# Altium PCB G431.PcbDoc
Units mil, origin at the board's own origin, x right, y up, seen from the top; angles counter-clockwise.
Board outline 2050 x 1660 mil, 2 copper layers (Top Layer, Bottom Layer); 32 components, 52 nets, 167 pads, 73 vias.
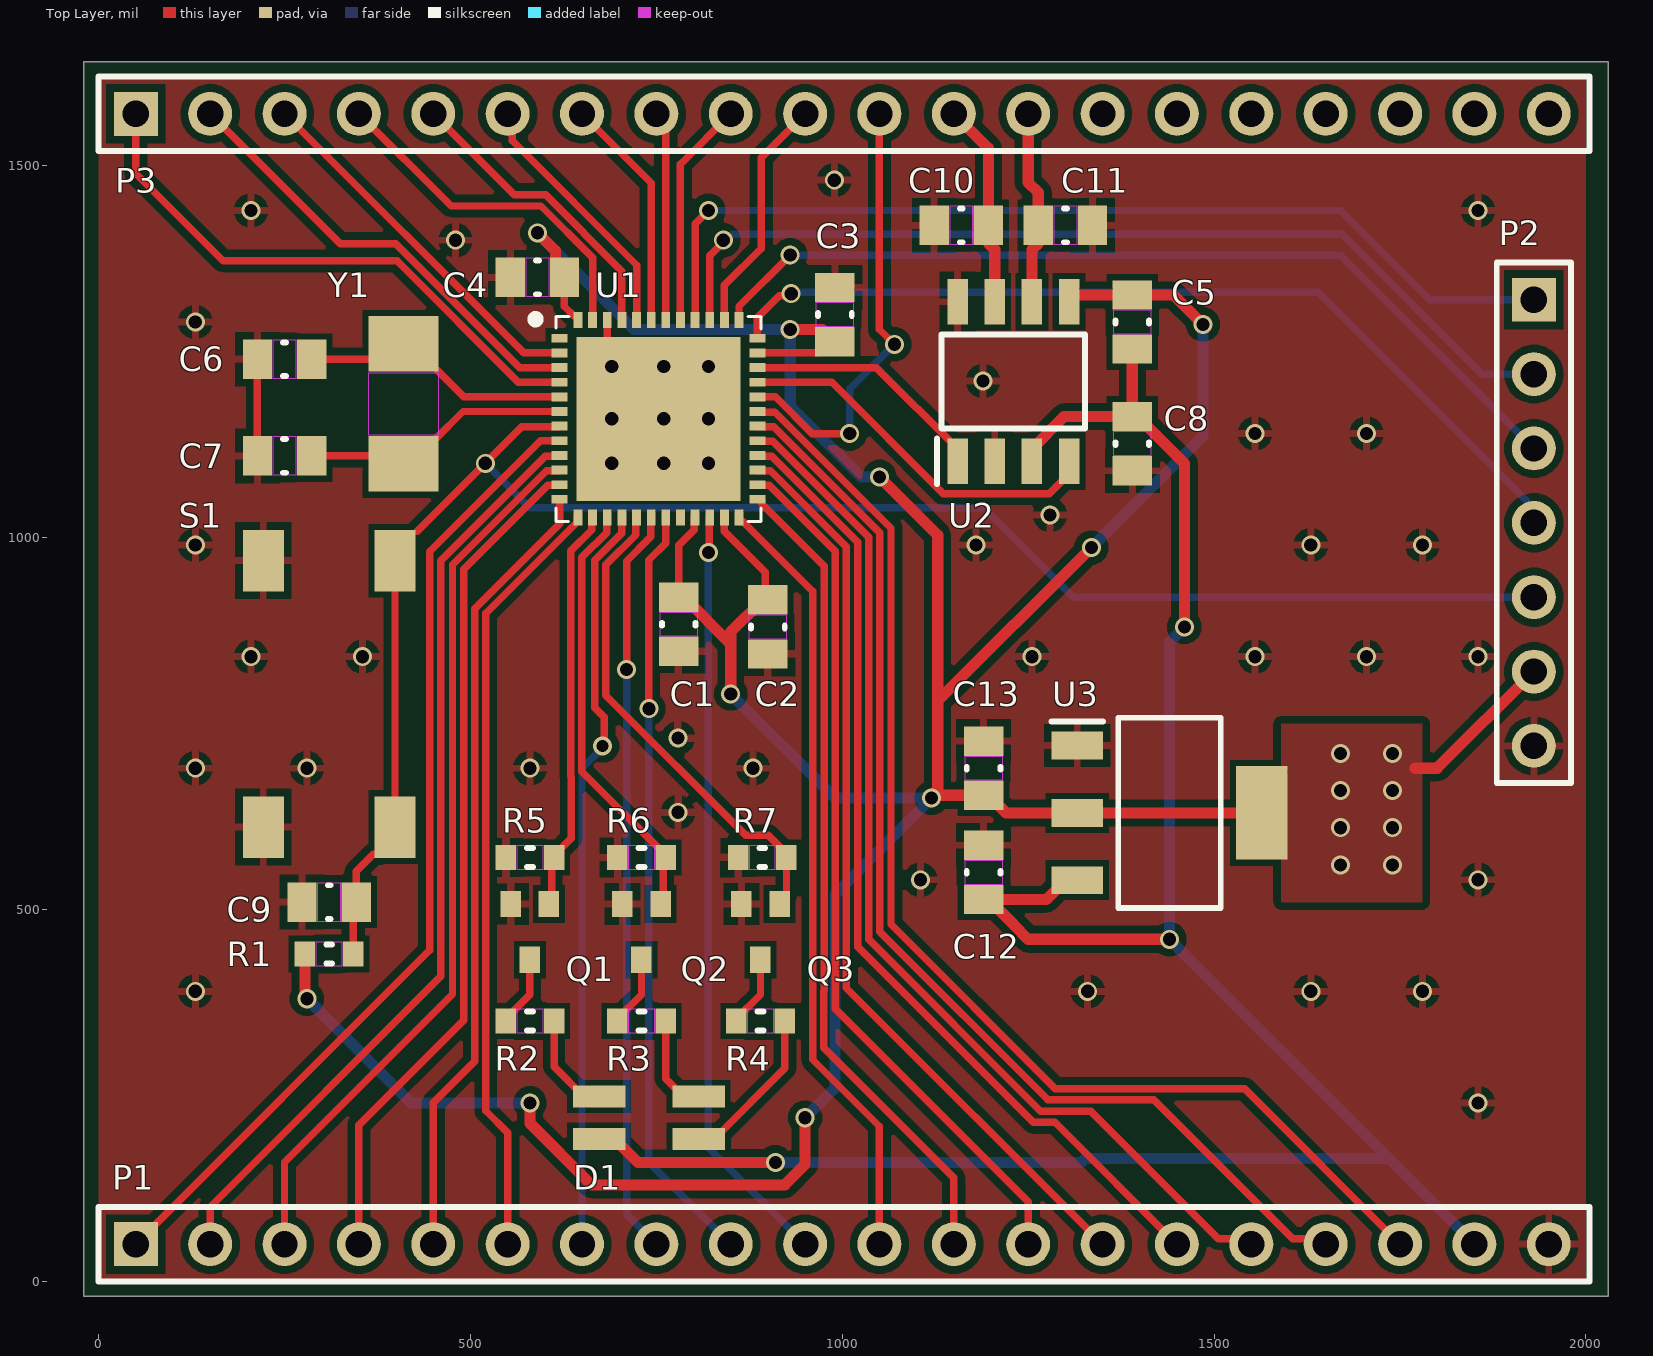
[diagram p0: Top Layer view]
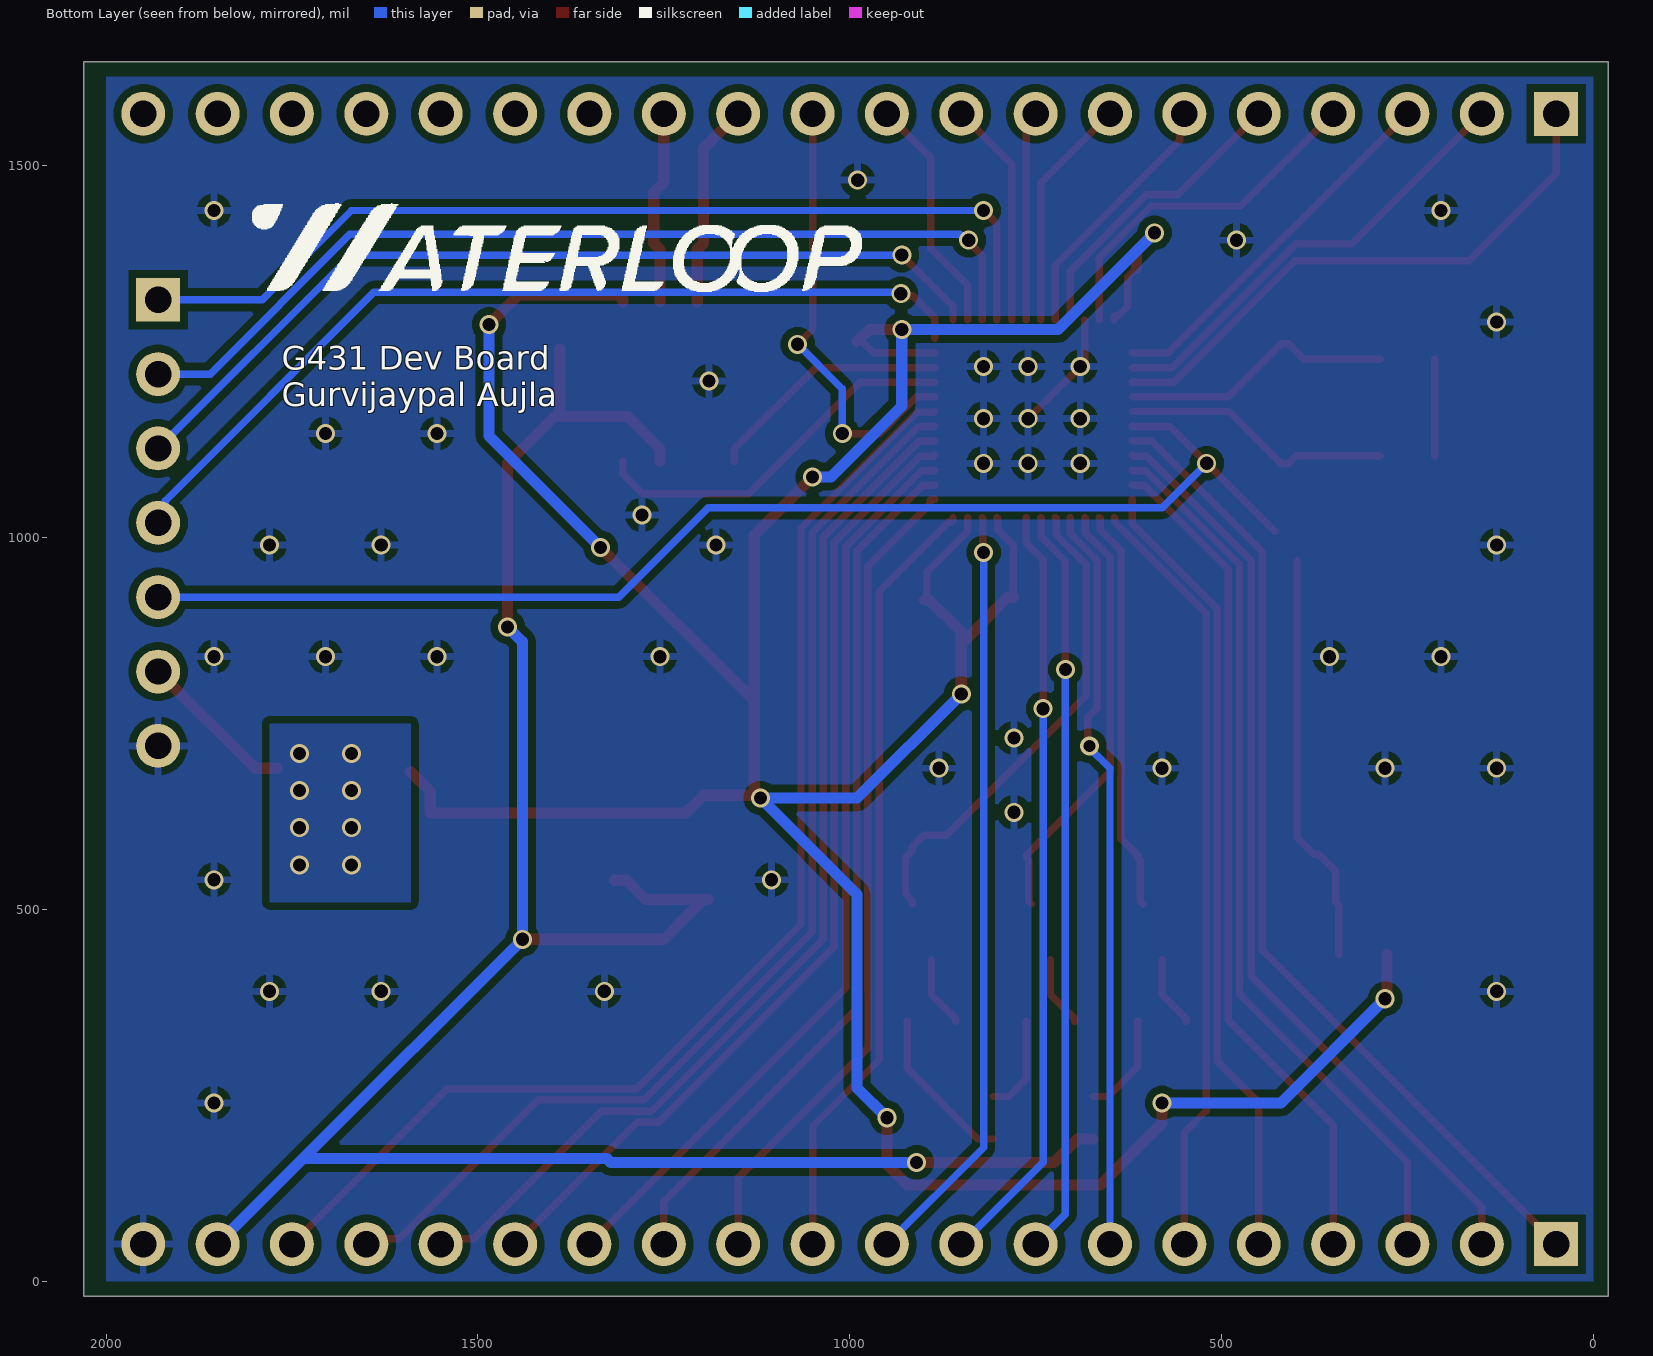
[diagram p1: Bottom Layer view, seen from below]
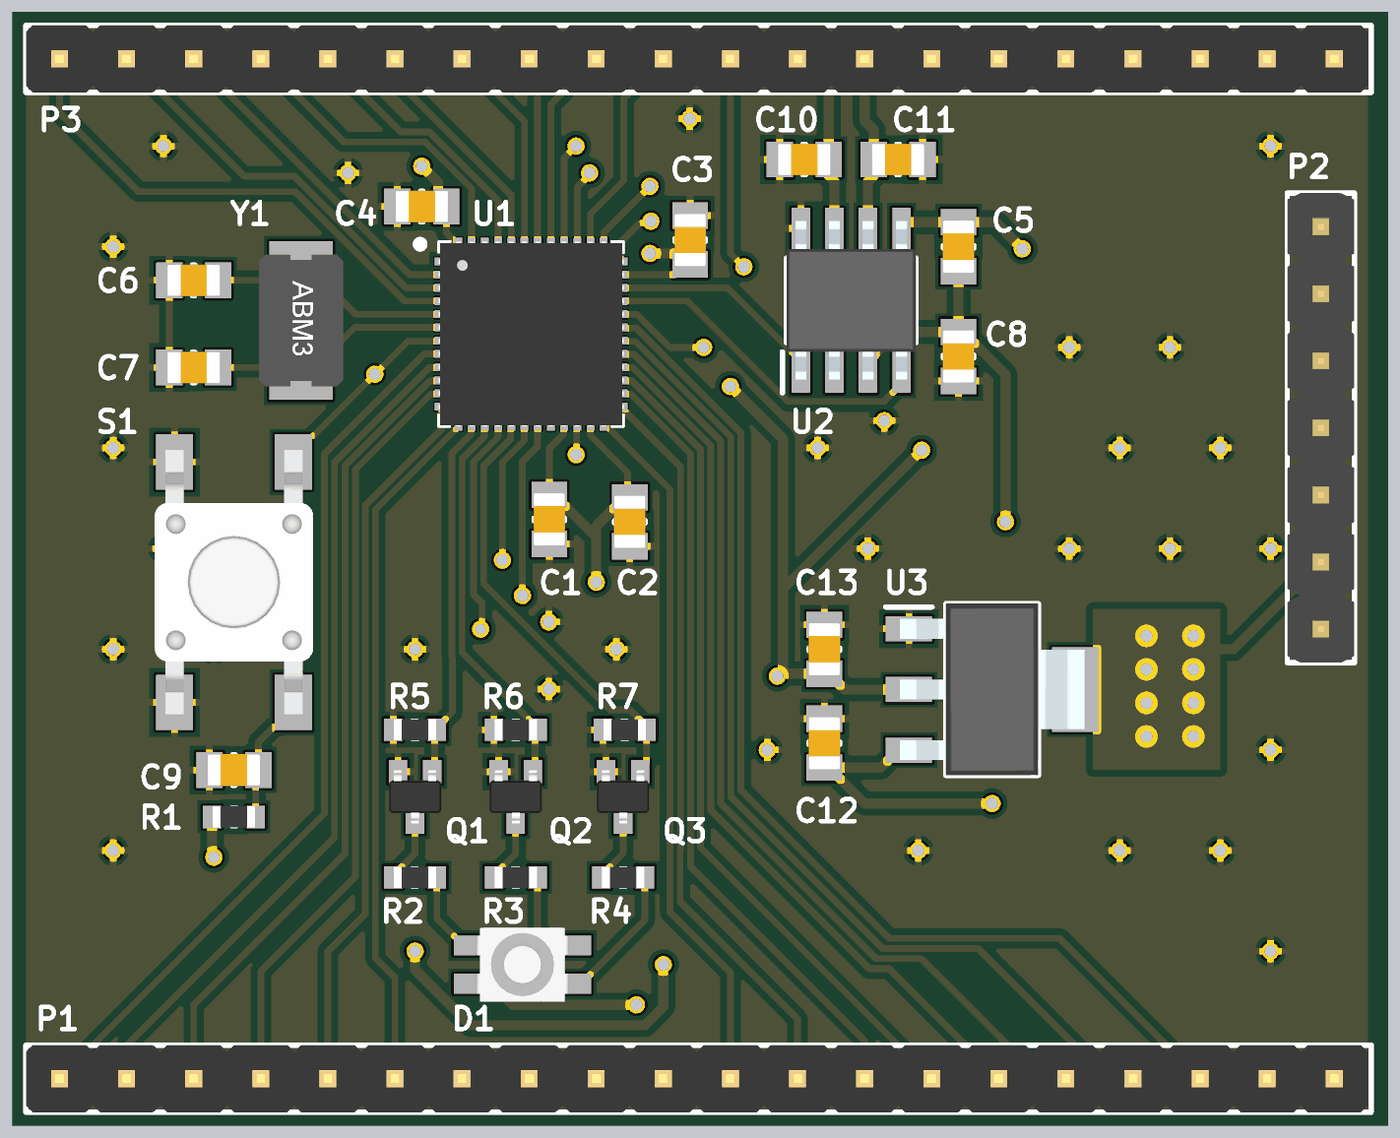
[diagram p2: 3D render of the assembled board from above, using the file's embedded part models]

## Layer stack, top to bottom
Top Solder: solder mask 0.4, Solder Resist, Dk 3.5
Top Layer: signal copper 1.4
Dielectric 1: dielectric 12.6, FR-4, Dk 4.8
Bottom Layer: signal copper 1.4
Bottom Solder: solder mask 0.4, Solder Resist, Dk 3.5

## Board outline
-20,1640 -20,-20 2030,-20 2030,1640

## Design rules (kind name [scope] priority, off if disabled: settings)
Clearance [All] p1: gap=10 ignorepadtopadclearanceinfootprint=FALSE except(0: Arc-Hole Track-Hole SMDPad-Hole THPad-Hole Via-Hole Fill-Hole Poly-Hole Region-Hole Text-Hole; 5: Arc-Arc Arc-Track Track-Track SMDPad-SMDPad; 7.87: Arc-SMDPad Track-SMDPad SMDPad-Fill SMDPad-Poly SMDPad-Region)
DiffPairsRouting [All] p1: maxlimit=10 minlimit=10 mostfreqgap=10 toplayer_minwidth=15 toplayer_maxwidth=15 toplayer_prefwidth=15 bottomlayer_minwidth=15 bottomlayer_maxwidth=15 bottomlayer_prefwidth=15 maxuncoupledlength=500
PolygonConnect PolygonConnect_2 [All vs IsNamedPolygon('3V3_L02_P002')] p1: connectstyle=Direct reliefconductorwidth=10 reliefentries=4 polygonreliefangle="90 Angle" airgapwidth=10
PolygonConnect PolygonConnect_1 [All vs IsNamedPolygon('3V3_L01_P001')] p2: connectstyle=Direct reliefconductorwidth=10 reliefentries=4 polygonreliefangle="90 Angle" airgapwidth=10
PolygonConnect [All] p3: connectstyle=Relief reliefconductorwidth=10 reliefentries=4 polygonreliefangle="90 Angle" airgapwidth=10
RoutingVias [All] p1: holewidth=19.68 width=39.37 viastyle="Through Hole" minholewidth=7.87 minwidth=23.62 maxholewidth=28 maxwidth=50
SilkToSolderMaskClearance [IsPad] p1: minsilkscreentomaskgap=5.91 clearancetoexposedcopper=TRUE
SolderMaskExpansion [All] p1: expansion=4 istentingtop=FALSE
Width [All] p1: maxlimit=15 minlimit=10 preferedwidth=15 toplayer_prefwidth=10 minimp=50.000000 maximp=50.000000 favimp=50.000000
28 further rules are at their usual default settings.

## Classes and differential pairs
net class PC[0..15]: PC0 PC1 PC2 PC3 PC4 PC5 PC6 PC7 PC8 PC9 PC10 PC11 PC12 PC13 PC14 PC15
net class PB[0..15]: PB0 PB1 PB2 PB3 PB4 PB5 PB6 PB7 PB8 PB9 PB10 PB11 PB12 PB13 PB14 PB15
net class PA[0..15]: PA0 PA1 PA2 PA3 PA4 PA5 PA6 PA7 PA8 PA9 PA10 PA11 PA12 PA13 PA14 PA15
component class "STM MCU": C1 C2 C3 C4 C5 C6 C7 C8 C9 C10 C11 D1 Q1 Q2 Q3 R1 R2 R3 R4 R5 R6 R7 S1 U1 U2 Y1
component class Main: C12 C13 P1 P2 P3 U3
differential pair CAN: +CAN_P -CAN_N

## Components (designator, comment, footprint, x,y, rotation, side; value= is the part's Value field where it differs from the comment)
C1 "Capacitor - Nonpolarized" "0805 - Capacitor" 780,883.58 r270 top value=10nF
C2 "Capacitor - Nonpolarized" "0805 - Capacitor" 900,880 r270 top value=0.1uF
C3 "Capacitor - Nonpolarized" "0805 - Capacitor" 990,1300 r90 top value=0.1uF
C4 "Capacitor - Nonpolarized" "0805 - Capacitor" 590,1350 r180 top value=0.1uF
C5 "Capacitor - Nonpolarized" "0805 - Capacitor" 1390,1290 r90 top value=0.1uF
C6 "Capacitor - Nonpolarized" "0805 - Capacitor" 250,1240 r0 top value=28pF
C7 "Capacitor - Nonpolarized" "0805 - Capacitor" 250,1110 r0 top value=28pF
C8 "Capacitor - Nonpolarized" "0805 - Capacitor" 1390,1126.42 r270 top value=0.1uF
C9 "Capacitor - Nonpolarized" "0805 - Capacitor" 310,510 r180 top value=0.1uF
C10 "Capacitor - Nonpolarized" "0805 - Capacitor" 1160,1420 r0 top value=0.1nF
C11 "Capacitor - Nonpolarized" "0805 - Capacitor" 1300,1420 r180 top value=0.1nF
C12 "Capacitor - Nonpolarized" "0805 - Capacitor" 1190,550 r270 top value=10uF
C13 "Capacitor - Nonpolarized" "0805 - Capacitor" 1190,690 r270 top value=10uF
D1 "RGB LED- Common Anode" "4-PLCC RGB LED" 740,220 r0 top
P1 "1x20 Header" HDR1X20 50,50 r0 top
P2 "1x7 Header" HDR1X7 1930,1320 r270 top
P3 "1x20 Header" HDR1X20 50,1570 r0 top
Q1 "MOSFET-N" SC70/SOT323 580,470 r0 top
Q2 "MOSFET-N" SC70/SOT323 730,470 r0 top
Q3 "MOSFET-N" SC70/SOT323 890,470 r0 top
R1 "Resistor" "0603 - Resistor" 310,440 r180 top value=10K
R2 "Resistor" "0603 - Resistor" 580,350 r0 top value=1K
R3 "Resistor" "0603 - Resistor" 730,350 r0 top value=1K
R4 "Resistor" "0603 - Resistor" 890,350 r0 top value=1K
R5 "Resistor" "0603 - Resistor" 580,570 r0 top value=10K
R6 "Resistor" "0603 - Resistor" 730,570 r0 top value=10K
R7 "Resistor" "0603 - Resistor" 892.48,570 r0 top value=10K
S1 "Switch - Push Button" "6x6mm Switch" 310,790 r270 top
U1 "STM32G431CBU6" STM32G431CBU6 620,1268.11 r0 top
U2 "TJA1051T_3,118" TJA1051T/3,118 1230,1210 r90 top
U3 "TLV1117-33IDCYR" TLV1117 1440,630 r0 top
Y1 "Oscillator" "2-SMD NO LEAD CRSYSTAL" 410,1180 r270 top

## Footprints (in the part's own frame and the unit in brackets; to place one, negate y for a bottom-side part, rotate by r counter-clockwise, add the part's x,y. Pads: shape width x height; smd on the part's side, far side on the other; paste and mask are expansions set on the pad)
"2-SMD NO LEAD CRSYSTAL" [mm]
  rect 1.9x2.4 smd: 1(-2.05,0) 2(2.05,0)
  Top Layer keep-out region: -1.05,1.2 -1.05,-1.2 1.05,-1.2 1.05,1.2
  body extent -2.5,-1.6 2.5,1.6, height 1.3
"4-PLCC RGB LED" [mm]
  rect 1.8x0.75 smd: 1(1.7,-0.725) 2(1.7,0.725) 3(-1.7,0.725) 4(-1.7,-0.725)
  body extent -1.75,-1.4 1.75,1.4, height 1.9
"6x6mm Switch" [mm]
  rect 2.1x1.4 smd: 1(-4.55,2.25) 1(4.55,2.25) 2(-4.55,-2.25) 2(4.55,-2.25)
  body extent -5,-3 5,3, height 5.12
"0603 - Resistor" [mm] "0603 Chip Resistor - IPC Medium Density"
  rect 0.7x0.85 smd: 1(-0.825,0) 2(0.825,0)
  Top Layer keep-out region: -0.45,0.4 -0.45,-0.4 0.45,-0.4 0.45,0.4
  silkscreen extent -0.1,-0.33 0.1,0.33, body extent -0.8,-0.4 0.8,0.4, height 0.45
"0805 - Capacitor" [mm] "0805 Chip Capacitor - IPC Medium Density"
  rect 1x1.35 smd: 1(-0.925,0) 2(0.925,0)
  Top Layer keep-out region: -0.4,0.65 -0.4,-0.65 0.4,-0.65 0.4,0.65
  silkscreen extent -0.05,-0.58 0.05,0.58, body extent -1,-0.6 1,0.6, height 1.2
HDR1X7 [mm] "Connector; Header; 7 Position"
  rect 1.5x1.5 hole 0.9: 1(0,0)
  round 1.5 hole 0.9: 2(2.54,0) 3(5.08,0) 4(7.62,0) 5(10.16,0) 6(12.7,0) 7(15.24,0)
  silkscreen extent -1.27,-1.27 16.51,1.27, body extent -1.27,-1.27 16.51,1.27, height 8.54
HDR1X20 [mm] "Connector; Header; 20 Position"
  rect 1.5x1.5 hole 0.9: 1(0,0)
  round 1.5 hole 0.9: 2(2.54,0) 3(5.08,0) 4(7.62,0) 5(10.16,0) 6(12.7,0) 7(15.24,0) 8(17.78,0) 9(20.32,0) 10(22.86,0) 11(25.4,0) 12(27.94,0) 13(30.48,0) 14(33.02,0) 15(35.56,0) 16(38.1,0) 17(40.64,0) 18(43.18,0) 19(45.72,0) 20(48.26,0)
  silkscreen extent -1.27,-1.27 49.66,1.27, body extent -1.27,-1.27 49.53,1.27, height 8.54
SC70/SOT323 [mm]
  rect 0.7x0.9 smd: 1(0.65,0.95) 2(0,-0.95) 3(-0.65,0.95)
  body extent -1,-1 1,1, height 1.05
STM32G431CBU6 [mm] "48-UFQFPN (7x7)"
  rect 0.55x0.3 smd mask+0.06: 1(0,0) 2(0,-0.5) 3(0,-1) 4(0,-1.5) 5(0,-2) 6(0,-2.5) 7(0,-3) 8(0,-3.5) 9(0,-4) 10(0,-4.5) 11(0,-5) 12(0,-5.5) 25(6.75,-5.5) 26(6.75,-5) 27(6.75,-4.5) 28(6.75,-4) 29(6.75,-3.5) 30(6.75,-3) 31(6.75,-2.5) 32(6.75,-2) 33(6.75,-1.5) 34(6.75,-1) 35(6.75,-0.5) 36(6.75,0)
  rect 0.3x0.55 smd mask+0.06: 13(0.625,-6.125) 14(1.125,-6.125) 15(1.625,-6.125) 16(2.125,-6.125) 17(2.625,-6.125) 18(3.125,-6.125) 19(3.625,-6.125) 20(4.125,-6.125) 21(4.625,-6.125) 22(5.125,-6.125) 23(5.625,-6.125) 24(6.125,-6.125) 37(6.125,0.625) 38(5.625,0.625) 39(5.125,0.625) 40(4.625,0.625) 41(4.125,0.625) 42(3.625,0.625) 43(3.125,0.625) 44(2.625,0.625) 45(2.125,0.625) 46(1.625,0.625) 47(1.125,0.625) 48(0.625,0.625)
  rect 5.6x5.6 smd: 49(3.375,-2.75)
  silkscreen extent -0.95,-6.25 6.88,0.78, body extent -0.12,-6.25 6.88,0.75, height 1.1
TJA1051T/3,118 [mm] "SOIC127P600X175-8N"
  rect 1.55x0.7 smd: 1(-2.725,1.905) 2(-2.725,0.635) 3(-2.725,-0.635) 4(-2.725,-1.905) 5(2.725,-1.905) 6(2.725,-0.635) 7(2.725,0.635) 8(2.725,1.905)
  silkscreen extent -3.5,-2.45 1.6,2.61, body extent -3,-2.45 3,2.45, height 1.75
TLV1117 [mm] "SOT230P700X180-4N"
  rect 1.75x0.95 smd: 1(-3.15,2.3) 2(-3.15,0) 3(-3.15,-2.3)
  rect 1.75x3.2 smd: 2(3.15,0)
  silkscreen extent -4.03,-3.25 1.75,3.25, body extent -3.5,-3.25 3.5,3.25, height 1.8

## Part data
C1 C2 C3 C4 C5 C6 C7 C8 C9 C10 C11 C12 C13: "Nonpolarized Capacitor"
P1 P3: "1x20 Pin Header"
P2: "1x7 Pin Header"
Q1 Q2 Q3: "N-Channel MOSFET"
S1: "Push Button Switch"
U1: "128K FLASH + 32K RAM MICRO", Manufacturer=ST, Supplier Part Number=C529356, ComponentLink1Description=Datasheet, ComponentLink1URL=https://www.st.com/resource/en/datasheet/stm32g431cb.pdf, Manufacturer Part Number=STM32G431CBU6, Supplier=JLCPCB
U2: "CAN Transceiver IC 4.5V-5.5V 250ns", Manufacturer=NXP, Manufacturer Part Number=TJA1051T/3,118, Supplier Part Number=568-8684-1-ND, ComponentLink1Description=Datasheet, ComponentLink1URL=http://www.nxp.com/docs/en/data-sheet/TJA1051.pdf, Supplier=Digikey
U3: "Linear Voltage Regulator IC 3.3V 800MA SOT223-4", Manufacturer="Texas Instruments", Supplier Part Number=296-21112-1-ND, ComponentLink1Description=Datasheet, ComponentLink1URL=http://www.ti.com/lit/ds/symlink/tlv1117.pdf?HQS=TI-null-null-digikeymode-df-pf-null-wwe&ts=1590668900314, Manufacturer Part Number=TLV1117-33IDCYR, Supplier=Digikey
Y1: "Crystal Oscillator"

## Via types
v1: diameter 25.59, hole 17.72, Top Layer to Bottom Layer, 72 vias
v2: diameter 25.59, hole 15.75, Top Layer to Bottom Layer, 1 vias

## Nets (pads, with @x,y where several pads share a name; then routed paths per layer and width w, separated by ;. In a path a pad name is that pad's centre, name@x,y a point inside that pad or via, vN(x,y) a via of type N, cw(c..) or ccw(c..) an arc to the next point about the centre after c; other vN are vias at no path point)
3V3: C1.1 C2.1 C3.1 C4.1 C5.2 C13.2 P2.6 R1.2 U1.21 U1.23 U1.35 U1.48 U2.5 U3.2 | length 5289.7
  Top Layer w10: C4.1@611.73,1364.69 614.23,1362.19 C4.1 626.42,1310.91 638.78,1298.54 643.7,1298.54 644.61,1297.64 U1.48 ; C1.1 780,989.63 801.18,1010.81 801.18,1026.06 U1.21 ; U1.23 841.46,1008.54 896.56,953.44 C2.1@896.56,916.42 ; U1.35 967.95,1248.43 983.11,1263.58 C3.1
  Top Layer w15: R1.2 277.52,382.48 v1(280,380) ; v1(580,240) 580,212.59 662.88,129.7 922.55,129.7 950,157.16 v1(950,220) ; v1(590,1410) 614.23,1385.77 C4.1@614.23,1362.19 ; C1.1 786.89,920 850,856.89 ; v1(850,790) 850,856.89 ; C2.1 896.56,916.42 893.11,916.42 850,873.31 850,856.89 ; v1(930,1280) 973.58,1280 C3.1 ; v1(1050,1081.74) 1128.34,1003.4 1128.34,780.08 ; U2.5 1305,1320.14 1311.28,1326.42 C5.2 1445.32,1326.42 v1(1485,1286.74) ; v1(1335,986.74) 1128.34,780.08 ; U3.2@1590.96,685.49 1564.02,658.54 1564.02,630 1315.98,630 1220.47,630 1196.89,653.58 C13.2 1123.58,653.58 v1(1120,650) 1120,652.87 1128.34,661.21 1128.34,780.08 ; 1770,690 1800,690 P2.6
  Bottom Layer w15: v1(280,380) 420,240 v1(580,240) ; v1(590,1410) 720,1280 v1(930,1280) 930,1177.16 1025.42,1081.74 v1(1050,1081.74) ; v1(850,790) 990,650 v1(1120,650) 990,520 990,260 v1(950,220) ; v1(1335,986.74) 1485,1136.74 v1(1485,1286.74)
  other v1: 1670,560 1740,560 1670,610 1740,610 1670,660 1740,660 1670,710 1740,710
5V: C5.1 C8.1 C12.2 D1.4 P1.19 U2.3 U3.3 | length 3063.7
  Top Layer w15: D1.4 693.74,191.46 725.2,160 v1(910,160) ; C12.2 C12.2@1196.89,513.58 ; U2.3 1255,1119.45 1298.39,1162.83 C8.1 ; U3.3 1300.24,539.45 1274.37,513.58 C12.2@1196.89,513.58 ; C5.1 C8.1 ; v1(1440,460) 1250,460 1230.29,479.71 1230.29,480.18 C12.2@1196.89,513.58 ; v1(1460,880) 1460,1099.72 1396.89,1162.83 C8.1
  Bottom Layer w15: v1(910,160) 1321.43,160 1326.43,165 1735,165 ; v1(1460,880) 1440,860 v1(1440,460) 1735,165 ; P1.19 1735,165
B: Q1.2 R2.1 | length 96.1
  Top Layer w10: R2.1 547.52,352.95 580,385.43 Q1.2
BLUE: Q1.1 R5.2 U1.14 | length 544.3
  Top Layer w10: Q1.1 609.04,510.85 609.04,566.56 R5.2 612.48,572.95 635.4,595.87 635.4,678.82 634.88,679.34 634.88,982.3 663.39,1010.81 663.39,1026.06 U1.14
CAN_N: C11.2 P3.13 U2.6 | length 261.9
  Top Layer w15: P3.13 1250,1477.66 1263.58,1464.07 1263.58,1430 1263.58,1395.93 1255,1387.34 U2.6
CAN_P: C10.2 P3.12 U2.7 | length 275.5
  Top Layer w15: P3.12 1196.42,1523.58 1196.42,1430 1196.42,1395.93 1205,1387.34 U2.7
CAN_RX: U1.33 U2.4 | length 509
  Top Layer w10: U1.33 986.16,1209.06 1135.89,1059.33 1278.35,1059.33 1305,1085.98 U2.4
CAN_TX: U1.34 U2.1 | length 331.3
  Top Layer w10: U1.34 1045.71,1228.74 1155,1119.45 U2.1
G: Q2.2 R3.1 | length 96.1
  Top Layer w10: R3.1 697.52,352.95 730,385.43 Q2.2
GND: C1.2 C2.2 C3.2 C4.2 C6.1 C7.1 C8.2 C9.2 C10.1 C11.1 C12.1 C13.1 P1.20 P2.7 Q1.3 Q2.3 Q3.3 R5.1 R6.1 R7.1 S1.2 U1.46 U1.49 U2.2 U2.8 U3.1 | length 291.4
  Top Layer w10: C7.1 C6.1 ; U1.46 683.98,1236.02 752.87,1167.13 U1.49
  other v1: 1855,240 130,390 1330,390 1630,390 1780,390 1105,540 1855,540 779.27,630.73 130,690 280,690 580,690 880,690 779.27,730.73 205,840 355,840 1255,840 1555,840 1705,840 1855,840 130,990 1180,990 1630,990 1780,990 1279.27,1030.73 690,1100 760,1100 820,1100 1555,1140 1705,1140 690,1160 760,1160 820,1160 1189.27,1210.73 690,1230 760,1230 820,1230 130,1290 480,1400 205,1440 1855,1440 989.27,1480.73
GREEN: Q2.1 R6.2 U1.15 | length 583.2
  Top Layer w10: U1.15 683.07,1026.06 683.07,1006.71 649.88,973.51 649.88,685.56 762.48,572.95 R6.2 759.04,566.56 759.04,510.85 Q2.1
NetD1_1: D1.1 R4.2 | length 218.5
  Top Layer w10: D1.1 827.6,191.46 922.48,286.34 R4.2
NetD1_2: D1.2 R3.2 | length 132
  Top Layer w10: R3.2 762.48,272.32 786.26,248.54 D1.2
NetD1_3: D1.3 R2.2 | length 138.7
  Top Layer w10: R2.2 612.48,288.46 652.4,248.54 D1.3
OSC_IN: C6.2 U1.5 Y1.1 | length 371.7
  Top Layer w10: C6.2 389.29,1240 Y1.1 419.84,1260.71 491.18,1189.37 U1.5
OSC_OUT: C7.2 U1.6 Y1.2 | length 367.3
  Top Layer w10: C7.2 399.29,1110 Y1.2 419.84,1099.29 452.24,1131.69 452.24,1131.89 490.04,1169.68 U1.6
PA0: P1.1 U1.8 | length 1331.5
  Top Layer w10: P1.1 445,445 445,981.14 594.17,1130.31 U1.8
PA1: P1.2 U1.9 | length 1266
  Top Layer w10: P1.2 150,100 460,410 460,968.94 600.78,1109.72 619.09,1109.72 U1.9
PA2: P1.3 U1.10 | length 1204
  Top Layer w10: P1.3 250,160 475.87,385.87 475.87,963.59 602.31,1090.04 619.09,1090.04 U1.10
PA3: P1.4 U1.11 | length 1142
  Top Layer w10: P1.4 350,210 490.87,350.87 490.87,957.38 603.84,1070.35 619.09,1070.35 U1.11
PA4: P1.5 U1.12 | length 1072
  Top Layer w10: P1.5 450,240 505.87,295.87 505.87,904.52 620,1018.65 U1.12
PA5: P1.6 U1.13 | length 1040.3
  Top Layer w10: P1.6 550,200 520.87,229.13 520.87,898.31 643.7,1021.14 643.7,1026.06 U1.13
PA8: P1.17 U1.30 | length 1534.2
  Top Layer w10: U1.30 886.65,1149.09 908.02,1149.09 1050.55,1006.56 1050.55,470 1276.58,243.98 1419,243.98 1605.47,57.5 1642.5,57.5 P1.17
PA9: P1.18 U1.31 | length 1640.1
  Top Layer w10: U1.31 886.65,1168.78 909.55,1168.78 1065.55,1012.78 1065.55,480 1286.58,258.98 1541.02,258.98 P1.18
PA10: P3.11 U1.32 | length 607.8
  Top Layer w10: U1.32 910.17,1189.37 959.54,1140 v1(1010,1140) ; P3.11 1050,1280 v1(1070,1260)
  Bottom Layer w10: v1(1010,1140) 1010,1200 v1(1070,1260)
PA15: P3.10 U1.38 | length 322.2
  Top Layer w10: U1.38 841.46,1339.23 891.04,1388.81 891.04,1511.04 P3.10
PB1: P1.8 U1.18 | length 1007.2
  Top Layer w10: v1(710,822.8) 710,968.64 742.5,1001.14 742.5,1026.44 U1.18
  Bottom Layer w10: v1(710,822.8) 710,90 P1.8
PB2: P1.9 U1.19 | length 1031.9
  Top Layer w10: v1(740,770) 740,970 762.72,992.72 U1.19
  Bottom Layer w10: v1(740,770) 740,160 P1.9
PB3: P3.9 U1.41 | length 305.3
  Top Layer w10: U1.41 782.4,1502.4 P3.9
PB4: P3.8 U1.42 | length 282.6
  Top Layer w10: P3.8 750,1556.73 762.72,1544.01 U1.42
PB5: P3.7 U1.43 | length 315.8
  Top Layer w10: P3.7 743.03,1476.97 U1.43
PB6: P3.6 U1.44 | length 349.1
  Top Layer w10: P3.6 556.49,1563.51 556.49,1533.51 723.35,1366.65 U1.44
PB7: P3.5 U1.45 | length 407
  Top Layer w10: P3.5 558.95,1461.05 601.05,1461.05 703.66,1358.44 U1.45
PB9: P3.4 U1.47 | length 478.3
  Top Layer w10: P3.4 473.95,1446.05 594.84,1446.05 664.29,1376.59 U1.47
PB10: P1.10 U1.22 | length 1031.6
  Top Layer w10: v1(820,980) 820.89,980.89 820.89,1026.08 U1.22
  Bottom Layer w10: v1(820,980) 820,180 P1.10
PB11: P1.11 U1.24 | length 1058.1
  Top Layer w10: U1.24 861.14,1022.05 862.05,1021.14 866.97,1021.14 960,928.11 960,298.28 1050,208.28 P1.11
PB12: P1.12 U1.25 | length 1114.1
  Top Layer w10: U1.25 890.67,1051.57 891.57,1050.67 891.57,1045.75 975.55,961.77 975.55,390 ; 975,390 975,314.14 1150,139.14 P1.12
PB13: P1.13 U1.26 | length 1181.1
  Top Layer w10: U1.26 886.65,1070.35 901.91,1070.35 990.55,981.71 990.55,366.36 1250,106.91 P1.13
PB14: P1.14 U1.27 | length 1243.1
  Top Layer w10: U1.27 886.65,1090.04 903.44,1090.04 1005.55,987.92 1005.55,394.45 P1.14
PB15: P1.15 U1.28 | length 1322.3
  Top Layer w10: U1.28 886.65,1109.72 904.96,1109.72 1020.55,994.14 1020.55,450 1256.58,213.98 1286.02,213.98 P1.15
PC4: P1.7 U1.16 | length 1009.8
  Top Layer w10: v2(677.67,720) 680,722.33 680,758.79 667.2,771.58 667.2,969.63 703.66,1006.09 U1.16
  Bottom Layer w10: P1.7 650,690 677.67,717.67 v2(677.67,720)
PC6: P1.16 U1.29 | length 1428.3
  Top Layer w10: U1.29 886.65,1129.41 906.49,1129.41 1035.55,1000.35 1035.55,460 1266.58,228.98 1334,228.98 1505.47,57.5 1542.5,57.5 P1.16
PC13: P3.3 U1.2 | length 503.2
  Top Layer w10: P3.3 571.57,1248.43 U1.2
PC14: P3.2 U1.3 | length 611.4
  Top Layer w10: P3.2 324.87,1395.13 399.64,1395.13 566.03,1228.74 U1.3
PC15: P3.1 U1.4 | length 767.7
  Top Layer w10: P3.1@50,1571.2 50,1489.73 167.62,1372.11 401.45,1372.11 564.51,1209.06 U1.4
R: Q3.2 R4.1 | length 96.1
  Top Layer w10: R4.1 857.52,352.95 890,385.43 Q3.2
RED: Q3.1 R7.2 U1.17 | length 658.8
  Top Layer w10: U1.17 722.44,1026.06 722.44,1003.65 682.2,963.42 682.2,787.8 870.39,599.61 900.72,599.61 916.18,584.14 916.18,578.78 R7.2 924.96,520.71 915.59,511.34 Q3.1
RESET: C9.1 P2.5 R1.1 S1.1 U1.7 | length 2290.8
  Top Layer w10: R1.1 342.48,506.06 C9.1 346.42,551.57 369.37,574.53 376.02,574.53 398.58,597.09 398.58,610.87 S1.1@398.58,969.13 ; 428.58,1008.58 v1(520,1100) 569.09,1149.09 619.09,1149.09 U1.7
  Bottom Layer w10: v1(520,1100) 580,1040 1190.47,1040 1310.47,920 P2.5
RX: P2.1 U1.40 | length 1314.4
  Top Layer w10: U1.40 802.09,1422.09 v1(820,1440)
  Bottom Layer w10: v1(820,1440) 1670,1440 1790,1320 P2.1
SWCLK: P2.3 U1.37 | length 1223.5
  Top Layer w10: U1.37 861.14,1311.14 v1(930,1380)
  Bottom Layer w10: v1(930,1380) 1670,1380 P2.3
SWDIO: P2.4 U1.36 | length 1226.2
  Top Layer w10: U1.36 885.75,1295.75 900.41,1310.41 900.5,1310.41 915.16,1325.07 928.37,1325.07 v1(931.35,1328.05)
  Bottom Layer w10: v1(931.35,1328.05) 933.3,1330 1640,1330 1920.61,1049.39 1920.61,1029.39 P2.4
TX: P2.2 U1.39 | length 1285.9
  Top Layer w10: U1.39 821.77,1378.92 840,1397.15 v1(840,1400)
  Bottom Layer w10: v1(840,1400) 844.22,1400 852.01,1407.8 1672.2,1407.8 1860,1220 P2.2
pads on no net: P3.14 P3.15 P3.16 P3.17 P3.18 P3.19 P3.20 U1.1 U1.20

## Polygon pours and split planes (outlines as drawn)
GND on Top Layer "GND_L01_P000" (solid, remove dead copper, pour order 0): 0,1620 0,0 2000,0 2000,1620
3V3 on Top Layer "3V3_L01_P001" (solid, remove dead copper, pour order 1): 1590,750 1590,510 1780,510 1780,750
GND on Bottom Layer "GND_L02_P003" (solid, remove dead copper, pour order 3): 0,1620 0,0 2000,0 2000,1620
3V3 on Bottom Layer "3V3_L02_P002" (solid, remove dead copper, pour order 2): 1590,750 1590,510 1780,510 1780,750

## Silkscreen, mask and mechanical layers (free items; w line width, h text height)
Bottom Overlay:
  drawing of 10 lines, arcs and shapes, not listed
  text "G431 Dev Board" at 1764,1226 h32
  text "Gurvijaypal Aujla" at 1764,1176.66 h32